# Altium PCB in3ator_LEDStrip2.PcbDoc
Units mm, origin at the board's own origin, x right, y up, seen from the top; angles counter-clockwise.
Board outline 215.27 x 145.28 mm, 2 copper layers (Top Layer, Bottom Layer); 100 components, 77 nets, 206 pads, 25 vias.
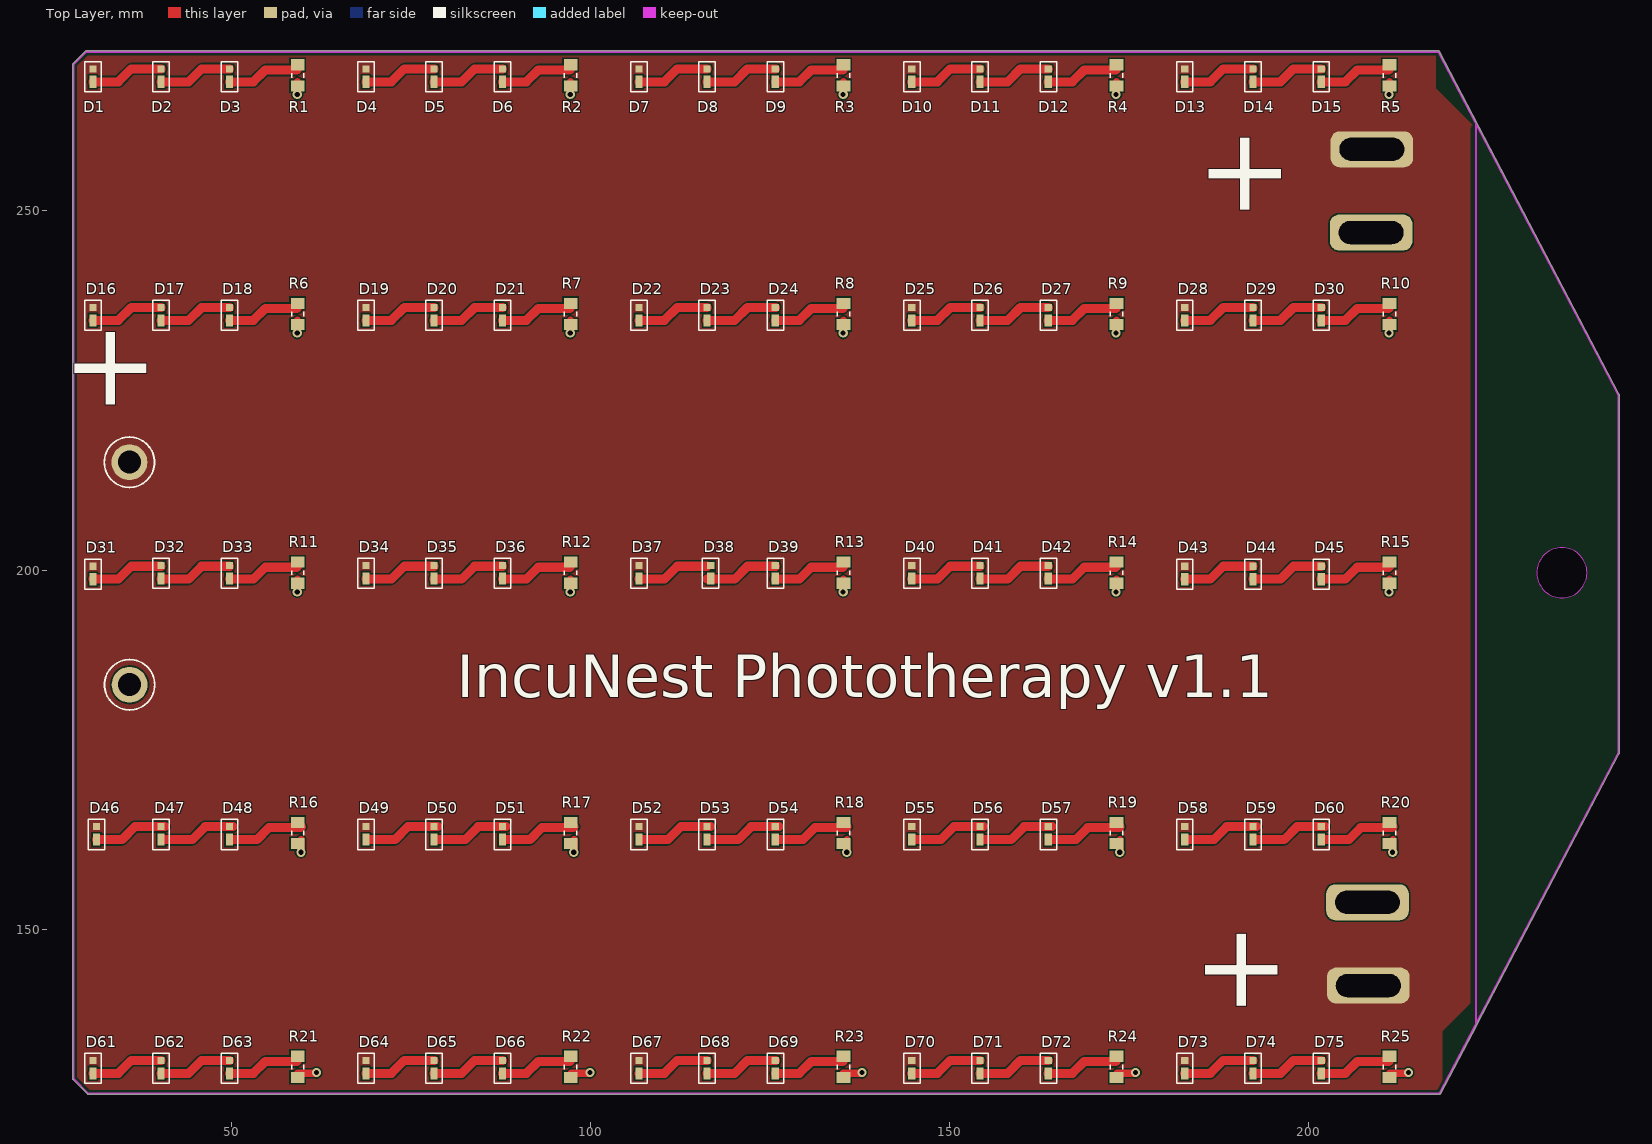
[diagram p0: Top Layer view]
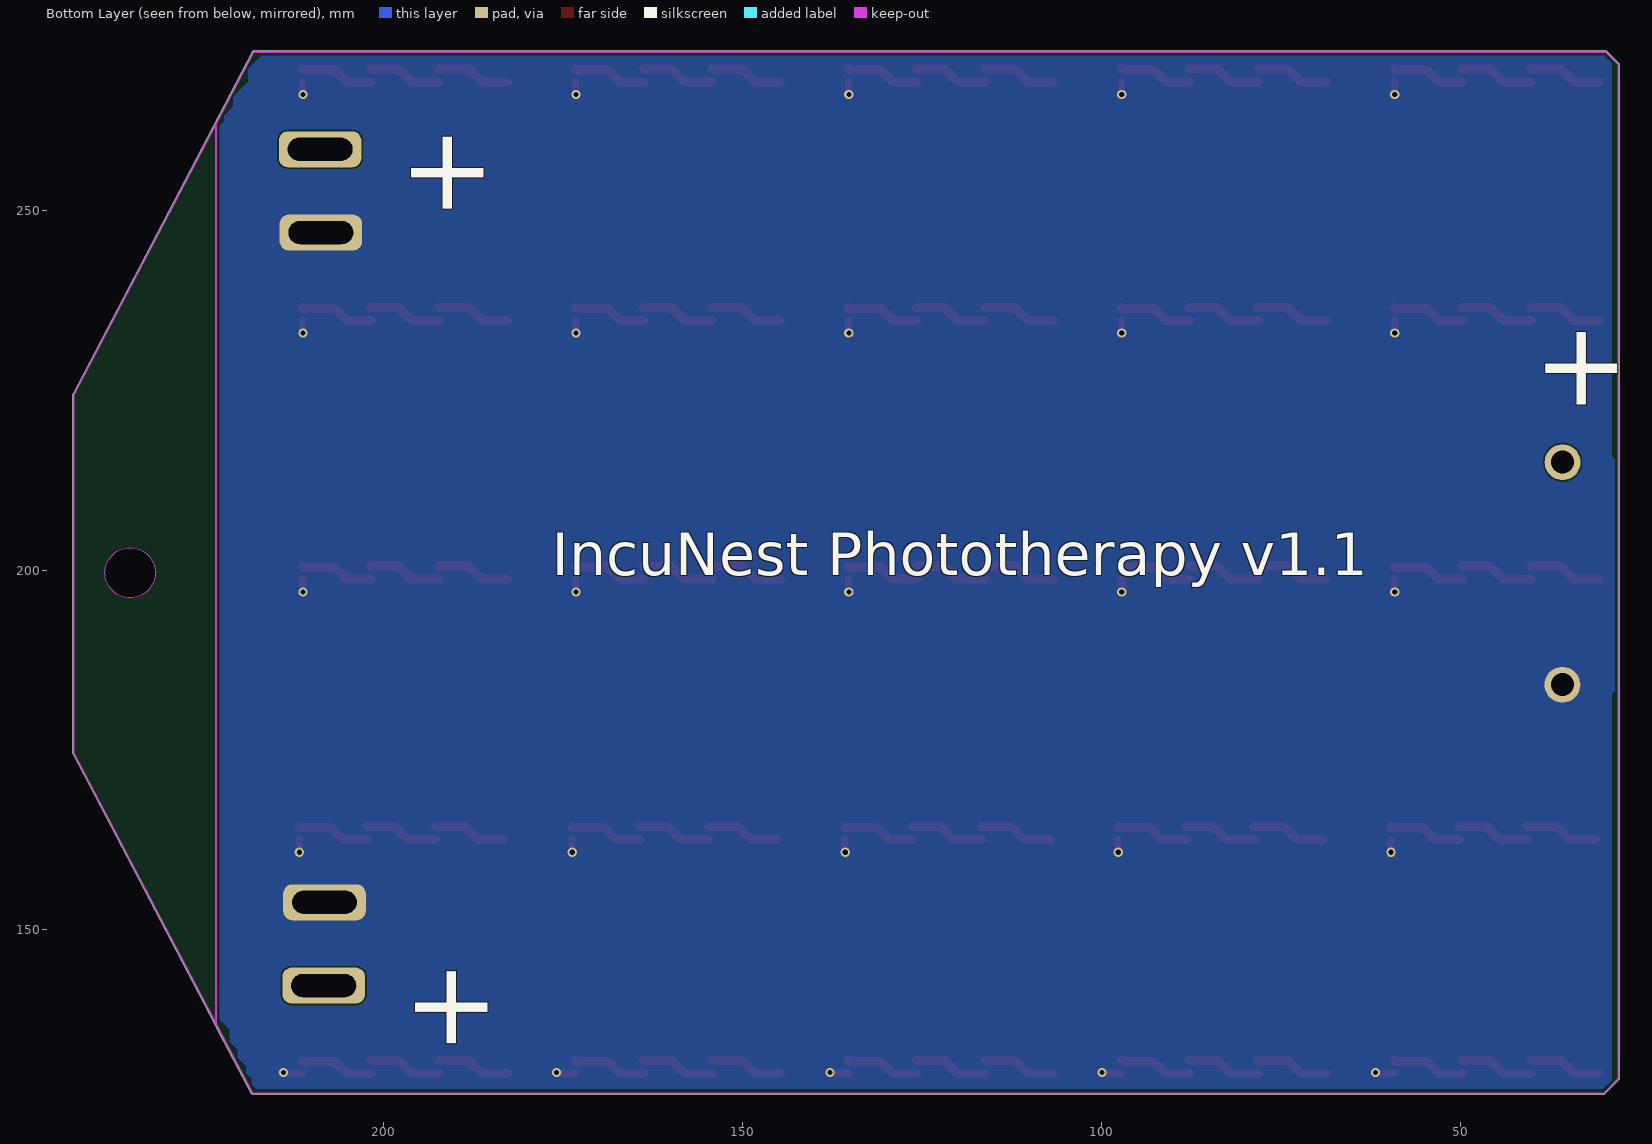
[diagram p1: Bottom Layer view, seen from below]

## Layer stack, top to bottom
Top Solder: solder mask 0.012, FC-001, Dk 4
Top Solder: solder mask 0.0102, Solder Resist, Dk 3.5
Top Layer: signal copper 0.0356
Dielectric 1: dielectric 0.32, FR-4, Dk 4.8
Bottom Layer: signal copper 0.0356
Flex Bottom Coverlay: solder mask 0.0102, Solder Resist, Dk 3.5
Flex Bottom Coverlay: solder mask 0.012, FC-001, Dk 4

## Board outline
27.977,129.068 cw(c28.067,129.159) 27.94,129.159 27.94,216.144 27.94,270.383 cw(c28.067,270.383) 27.94,270.39 cw(c28.067,270.397) 27.977,270.487 29.734,272.245 cw(c29.825,272.155) 29.894,272.261 218.067,272.261 cw(c218.067,272.134) 218.181,272.191 243.191,224.458 cw(c243.078,224.399) 243.205,224.399 243.205,174.517 cw(c243.078,174.517) 243.191,174.458 223.389,136.746 cw(c223.266,136.779) 223.363,136.696 218.311,127.075 cw(c218.198,127.134) 218.132,127.025 cw(c218.067,127.134) 218.067,127.007 30.092,127.007 cw(c30.092,127.134) 30.001,127.044 30.002,127.044
cut-out: 231.732,199.627 ccw(c235.232,199.627) 235.232,196.127 ccw(c235.232,199.627) 238.732,199.627 ccw(c235.232,199.627) 235.232,203.127 ccw(c235.232,199.627)

## Design rules (kind name [scope] priority, off if disabled: settings)
AssemblyTestPointUsage AssemblyTestPointUsage_1 [All] p2:
AssemblyTestpoint AssemblyTestpoint_1 [All] p2: testpointundercomponent=TRUE minsize=1.016 maxsize=2.54 preferedsize=1.524 minholesize=0 maxholesize=1.016 preferedholesize=0.813 testpointgrid=0.025 usegrid=TRUE gridtolerance=0 allowsidetop=TRUE allowsidebottom=TRUE
Clearance "Board outline clearance" [All vs OnLayer('Keep-Out Layer')] p1: gap=0.381 ignorepadtopadclearanceinfootprint=FALSE except(0: Arc-Hole Track-Hole SMDPad-Hole THPad-Hole Via-Hole Fill-Hole Poly-Hole Region-Hole Text-Hole)
Clearance Clearance_1 [All] p2: gap=0.2 ignorepadtopadclearanceinfootprint=FALSE except(0: Arc-Hole Track-Hole SMDPad-Hole THPad-Hole Via-Hole Fill-Hole Poly-Hole Region-Hole Text-Hole; 0.17: SMDPad-SMDPad; 0.254: Track-Via; 0.33: Track-THPad)
ComponentClearance [InComponent('L1')] p1: gap=0 collisioncheckmode=3 verticalgap=0.254 showdistances=FALSE
ComponentClearance UFL [InComponent('RF_CON1')] p2: gap=0 collisioncheckmode=3 verticalgap=0.254 showdistances=FALSE
ComponentClearance ComponentClearance_1 [All] p3: gap=0.254 collisioncheckmode=3 verticalgap=0.254 showdistances=FALSE
DiffPairsRouting [All] p1: maxlimit=0.254 minlimit=0.203 mostfreqgap=0.254 toplayer_minwidth=0.203 toplayer_maxwidth=0.381 toplayer_prefwidth=0.381 bottomlayer_minwidth=0.203 bottomlayer_maxwidth=0.381 bottomlayer_prefwidth=0.381 substack1={523C32A3-E987-4162-AA8D-483919F97A58} toplayer_{523c32a3-e987-4162-aa8d-483919f97a58}_minwidth=0.381 toplayer_{523c32a3-e987-4162-aa8d-483919f97a58}_maxwidth=0.381 toplayer_{523c32a3-e987-4162-aa8d-483919f97a58}_prefwidth=0.381 bottomlayer_{523c32a3-e987-4162-aa8d-483919f97a58}_minwidth=0.381 bottomlayer_{523c32a3-e987-4162-aa8d-483919f97a58}_maxwidth=0.381 bottomlayer_{523c32a3-e987-4162-aa8d-483919f97a58}_prefwidth=0.381 maxuncoupledlength=12.7
DiffPairsRouting DiffPairsRouting_1 [All] p2: maxlimit=0.254 minlimit=0.254 mostfreqgap=0.254 toplayer_minwidth=0.381 toplayer_maxwidth=0.381 toplayer_prefwidth=0.381 bottomlayer_minwidth=0.381 bottomlayer_maxwidth=0.381 bottomlayer_prefwidth=0.381 substack1={523C32A3-E987-4162-AA8D-483919F97A58} toplayer_{523c32a3-e987-4162-aa8d-483919f97a58}_minwidth=0.381 toplayer_{523c32a3-e987-4162-aa8d-483919f97a58}_maxwidth=0.381 toplayer_{523c32a3-e987-4162-aa8d-483919f97a58}_prefwidth=0.381 bottomlayer_{523c32a3-e987-4162-aa8d-483919f97a58}_minwidth=0.381 bottomlayer_{523c32a3-e987-4162-aa8d-483919f97a58}_maxwidth=0.381 bottomlayer_{523c32a3-e987-4162-aa8d-483919f97a58}_prefwidth=0.381 maxuncoupledlength=12.7
FabricationTestPointUsage FabricationTestPointUsage_1 [All] p2: valid=0 allowmultiple=FALSE
FabricationTestpoint FabricationTestpoint_1 [All] p2: side=3 testpointundercomponent=TRUE minsize=1.016 maxsize=2.54 preferedsize=1.524 minholesize=0 maxholesize=1.016 preferedholesize=0.813 testpointgrid=0.025 allowsidetop=TRUE allowsidebottom=TRUE usegrid=TRUE gridtolerance=0
FanoutControl Fanout_LCC [IsLCC] p1: bgadir=Out bgaviamode=Centered fanoutstyle=Auto fanoutdirection=Alternating viagrid=0.025 // Fanout_LCC (Default Rule)
FanoutControl Fanout_BGA [IsBGA] p2: bgadir=Out bgaviamode=Centered fanoutstyle=Auto fanoutdirection=Alternating viagrid=0.025 // Fanout_BGA (Default Rule)
FanoutControl Fanout_Small [(CompPinCount < 5)] p3: bgadir=Out bgaviamode=Centered fanoutstyle=Auto fanoutdirection=OutThenIn viagrid=0.025 // Fanout_Small (Default Rule)
FanoutControl Fanout_SOIC [IsSOIC] p4: bgadir=Out bgaviamode=Centered fanoutstyle=Auto fanoutdirection=Alternating viagrid=0.025 // Fanout_SOIC (Default Rule)
FanoutControl Fanout_BGA_1 [IsBGA] p6: bgadir=Out bgaviamode=Centered fanoutstyle=Auto fanoutdirection=Alternating viagrid=0.025 // Fanout_BGA (Default Rule)
FanoutControl Fanout_LCC_1 [IsLCC] p7: bgadir=Out bgaviamode=Centered fanoutstyle=Auto fanoutdirection=Alternating viagrid=0.025 // Fanout_LCC (Default Rule)
FanoutControl Fanout_SOIC_1 [IsSOIC] p8: bgadir=Out bgaviamode=Centered fanoutstyle=Auto fanoutdirection=Alternating viagrid=0.025 // Fanout_SOIC (Default Rule)
FanoutControl Fanout_Small_1 [(CompPinCount < 5)] p9: bgadir=Out bgaviamode=Centered fanoutstyle=Auto fanoutdirection=OutThenIn viagrid=0.025 // Fanout_Small (Default Rule)
FanoutControl Fanout_Default_1 [All] p10: bgadir=Out bgaviamode=Centered fanoutstyle=Auto fanoutdirection=Alternating viagrid=0.025 // Fanout_Default (Default Rule)
Height Height_1 [All] p1: minheight=0 maxheight=50 prefheight=12.7
HoleSize HoleSize_1 [All] p1: absolutevalues=TRUE maxlimit=15 minlimit=0.2 maxpercent=80.000 minpercent=20.000
HoleToHoleClearance u8 [All vs InComponent('u8_1')] p1: gap=0 allowstackedmicrovias=TRUE
HoleToHoleClearance [All] p2: gap=0.254 allowstackedmicrovias=TRUE
LayerPairs LayerPairs_1 [All] p1: enforce=TRUE
MinimumAnnularRing [All] p1: minimumring=0.1
MinimumSolderMaskSliver MinimumSolderMaskSliver_1 [All] p1 off: minsoldermaskwidth=0.2
NetAntennae NetAntennae_1 [All] p2: netantennaetolerance=0
PasteMaskExpansion PasteMaskExpansion_1 [All] p2: expansion=0
PlaneClearance PlaneClearance_1 [All] p1: clearance=0.508
PlaneConnect PlaneConnect_1 [All] p1: planeconnectstyle=Relief reliefexpansion=0.508 reliefentries=4 reliefconductorwidth=0.7 reliefairgap=0.254
PolygonConnect Power [All] p1: connectstyle=Direct reliefconductorwidth=2.54 reliefentries=4 polygonreliefangle="90 Angle" airgapwidth=0.254
RoutingCorners RoutingCorners_1 [All] p2: cornerstyle=45-Degree minsetback=2.54 maxsetback=2.54
RoutingLayers RoutingLayers_1 [All] p2: top layer_v5=TRUE bottom layer_v5=TRUE
RoutingPriority RoutingPriority_1 [All] p2: routingpriority=0
RoutingTopology RoutingTopology_1 [All] p2: topology=Shortest
RoutingVias RoutingVias_1 [All] p1: holewidth=0.3 width=0.5 viastyle="Through Hole" minholewidth=0.2 minwidth=0.4 maxholewidth=0.711 maxwidth=1.27
ShortCircuit ShortCircuit_Antenna [InNet('NetC10_2')] p1: allowed=TRUE
ShortCircuit ShortCircuit_1 [All] p2: allowed=FALSE
SilkToSilkClearance SilkToSilkClearance_1 [All] p1: silktosilkclearance=0
SilkToSolderMaskClearance SilkToSolderMaskClearance_1 [IsPad] p1: minsilkscreentomaskgap=0 clearancetoexposedcopper=TRUE
SolderMaskExpansion [All] p1: expansion=0.102 istentingtop=FALSE
SolderMaskExpansion SolderMaskExpansion_1 [All] p2: expansion=0.102 istentingtop=FALSE
UnRoutedNet UnRoutedNet_1 [All] p1:
UnpouredPolygon UnpouredPolygon_1 [All] p2:
Width Width_GSM_ANTENNA_1 [InNet('NetC10_2')] p1: maxlimit=0.35 minlimit=0.35 preferedwidth=0.35 substack1={523C32A3-E987-4162-AA8D-483919F97A58}
Width Width_GSM_ANTENNA_2 [InNet('NetC9_2')] p2: maxlimit=0.35 minlimit=0.35 preferedwidth=0.35 substack1={523C32A3-E987-4162-AA8D-483919F97A58}
Width Width_1 [All] p3: maxlimit=8 minlimit=0.1 preferedwidth=0.2 substack1={523C32A3-E987-4162-AA8D-483919F97A58}
13 further rules are at their usual default settings.

## Components (designator, comment, footprint, x,y, rotation, side; value= is the part's Value field where it differs from the comment)
D1 "XL-3014UBC-02" Diode_led 30.734,268.865 r270 top
D2 "XL-3014UBC-02" Diode_led 40.234,268.865 r270 top
D3 "XL-3014UBC-02" Diode_led 49.734,268.865 r270 top
D4 "XL-3014UBC-02" Diode_led 68.734,268.865 r270 top
D5 "XL-3014UBC-02" Diode_led 78.234,268.865 r270 top
D6 "XL-3014UBC-02" Diode_led 87.734,268.865 r270 top
D7 "XL-3014UBC-02" Diode_led 106.734,268.865 r270 top
D8 "XL-3014UBC-02" Diode_led 116.234,268.865 r270 top
D9 "XL-3014UBC-02" Diode_led 125.734,268.865 r270 top
D10 "XL-3014UBC-02" Diode_led 144.734,268.865 r270 top
D11 "XL-3014UBC-02" Diode_led 154.234,268.865 r270 top
D12 "XL-3014UBC-02" Diode_led 163.734,268.865 r270 top
D13 "XL-3014UBC-02" Diode_led 182.734,268.865 r270 top
D14 "XL-3014UBC-02" Diode_led 192.234,268.865 r270 top
D15 "XL-3014UBC-02" Diode_led 201.734,268.865 r270 top
D16 "XL-3014UBC-02" Diode_led 30.734,235.657 r270 top
D17 "XL-3014UBC-02" Diode_led 40.234,235.657 r270 top
D18 "XL-3014UBC-02" Diode_led 49.734,235.657 r270 top
D19 "XL-3014UBC-02" Diode_led 68.734,235.657 r270 top
D20 "XL-3014UBC-02" Diode_led 78.234,235.657 r270 top
D21 "XL-3014UBC-02" Diode_led 87.734,235.657 r270 top
D22 "XL-3014UBC-02" Diode_led 106.734,235.657 r270 top
D23 "XL-3014UBC-02" Diode_led 116.234,235.657 r270 top
D24 "XL-3014UBC-02" Diode_led 125.734,235.657 r270 top
D25 "XL-3014UBC-02" Diode_led 144.734,235.657 r270 top
D26 "XL-3014UBC-02" Diode_led 154.234,235.657 r270 top
D27 "XL-3014UBC-02" Diode_led 163.734,235.657 r270 top
D28 "XL-3014UBC-02" Diode_led 182.734,235.657 r270 top
D29 "XL-3014UBC-02" Diode_led 192.234,235.657 r270 top
D30 "XL-3014UBC-02" Diode_led 201.734,235.657 r270 top
D31 "XL-3014UBC-02" Diode_led 30.734,199.634 r270 top
D32 "XL-3014UBC-02" Diode_led 40.234,199.734 r270 top
D33 "XL-3014UBC-02" Diode_led 49.734,199.734 r270 top
D34 "XL-3014UBC-02" Diode_led 68.734,199.734 r270 top
D35 "XL-3014UBC-02" Diode_led 78.234,199.734 r270 top
D36 "XL-3014UBC-02" Diode_led 87.734,199.734 r270 top
D37 "XL-3014UBC-02" Diode_led 106.734,199.734 r270 top
D38 "XL-3014UBC-02" Diode_led 116.734,199.734 r270 top
D39 "XL-3014UBC-02" Diode_led 125.734,199.734 r270 top
D40 "XL-3014UBC-02" Diode_led 144.734,199.734 r270 top
D41 "XL-3014UBC-02" Diode_led 154.234,199.734 r270 top
D42 "XL-3014UBC-02" Diode_led 163.734,199.734 r270 top
D43 "XL-3014UBC-02" Diode_led 182.734,199.634 r270 top
D44 "XL-3014UBC-02" Diode_led 192.234,199.634 r270 top
D45 "XL-3014UBC-02" Diode_led 201.734,199.634 r270 top
D46 "XL-3014UBC-02" Diode_led 31.231,163.384 r270 top
D47 "XL-3014UBC-02" Diode_led 40.234,163.384 r270 top
D48 "XL-3014UBC-02" Diode_led 49.734,163.384 r270 top
D49 "XL-3014UBC-02" Diode_led 68.734,163.384 r270 top
D50 "XL-3014UBC-02" Diode_led 78.234,163.384 r270 top
D51 "XL-3014UBC-02" Diode_led 87.734,163.384 r270 top
D52 "XL-3014UBC-02" Diode_led 106.734,163.384 r270 top
D53 "XL-3014UBC-02" Diode_led 116.234,163.384 r270 top
D54 "XL-3014UBC-02" Diode_led 125.734,163.384 r270 top
D55 "XL-3014UBC-02" Diode_led 144.734,163.384 r270 top
D56 "XL-3014UBC-02" Diode_led 154.234,163.384 r270 top
D57 "XL-3014UBC-02" Diode_led 163.734,163.384 r270 top
D58 "XL-3014UBC-02" Diode_led 182.734,163.384 r270 top
D59 "XL-3014UBC-02" Diode_led 192.234,163.384 r270 top
D60 "XL-3014UBC-02" Diode_led 201.734,163.384 r270 top
D61 "XL-3014UBC-02" Diode_led 30.734,130.835 r270 top
D62 "XL-3014UBC-02" Diode_led 40.234,130.835 r270 top
D63 "XL-3014UBC-02" Diode_led 49.734,130.835 r270 top
D64 "XL-3014UBC-02" Diode_led 68.734,130.835 r270 top
D65 "XL-3014UBC-02" Diode_led 78.234,130.835 r270 top
D66 "XL-3014UBC-02" Diode_led 87.734,130.835 r270 top
D67 "XL-3014UBC-02" Diode_led 106.734,130.835 r270 top
D68 "XL-3014UBC-02" Diode_led 116.234,130.835 r270 top
D69 "XL-3014UBC-02" Diode_led 125.734,130.835 r270 top
D70 "XL-3014UBC-02" Diode_led 144.734,130.835 r270 top
D71 "XL-3014UBC-02" Diode_led 154.234,130.835 r270 top
D72 "XL-3014UBC-02" Diode_led 163.734,130.835 r270 top
D73 "XL-3014UBC-02" Diode_led 182.734,130.835 r270 top
D74 "XL-3014UBC-02" Diode_led 192.234,130.835 r270 top
D75 "XL-3014UBC-02" Diode_led 201.734,130.835 r270 top
R1 "39R 1206 0.5W 1%" CAPC3216X180X55ML20T25 59.234,268.865 r270 top
R2 "39R 1206 0.5W 1%" CAPC3216X180X55ML20T25 97.234,268.865 r270 top
R3 "39R 1206 0.5W 1%" CAPC3216X180X55ML20T25 135.234,268.865 r270 top
R4 "39R 1206 0.5W 1%" CAPC3216X180X55ML20T25 173.234,268.865 r270 top
R5 "39R 1206 0.5W 1%" CAPC3216X180X55ML20T25 211.234,268.865 r270 top
R6 "39R 1206 0.5W 1%" CAPC3216X180X55ML20T25 59.234,235.657 r270 top
R7 "39R 1206 0.5W 1%" CAPC3216X180X55ML20T25 97.234,235.657 r270 top
R8 "39R 1206 0.5W 1%" CAPC3216X180X55ML20T25 135.234,235.657 r270 top
R9 "39R 1206 0.5W 1%" CAPC3216X180X55ML20T25 173.234,235.657 r270 top
R10 "39R 1206 0.5W 1%" CAPC3216X180X55ML20T25 211.234,235.657 r270 top
R11 "39R 1206 0.5W 1%" CAPC3216X180X55ML20T25 59.234,199.634 r270 top
R12 "39R 1206 0.5W 1%" CAPC3216X180X55ML20T25 97.234,199.634 r270 top
R13 "39R 1206 0.5W 1%" CAPC3216X180X55ML20T25 135.234,199.634 r270 top
R14 "39R 1206 0.5W 1%" CAPC3216X180X55ML20T25 173.234,199.634 r270 top
R15 "39R 1206 0.5W 1%" CAPC3216X180X55ML20T25 211.234,199.634 r270 top
R16 "39R 1206 0.5W 1%" CAPC3216X180X55ML20T25 59.234,163.384 r270 top
R17 "39R 1206 0.5W 1%" CAPC3216X180X55ML20T25 97.234,163.384 r270 top
R18 "39R 1206 0.5W 1%" CAPC3216X180X55ML20T25 135.234,163.384 r270 top
R19 "39R 1206 0.5W 1%" CAPC3216X180X55ML20T25 173.234,163.384 r270 top
R20 "39R 1206 0.5W 1%" CAPC3216X180X55ML20T25 211.234,163.384 r270 top
R21 "39R 1206 0.5W 1%" CAPC3216X180X55ML20T25 59.234,130.835 r270 top
R22 "39R 1206 0.5W 1%" CAPC3216X180X55ML20T25 97.234,130.835 r270 top
R23 "39R 1206 0.5W 1%" CAPC3216X180X55ML20T25 135.234,130.835 r270 top
R24 "39R 1206 0.5W 1%" CAPC3216X180X55ML20T25 173.234,130.835 r270 top
R25 "39R 1206 0.5W 1%" CAPC3216X180X55ML20T25 211.234,130.835 r270 top

## Footprints (in the part's own frame and the unit in brackets; to place one, negate y for a bottom-side part, rotate by r counter-clockwise, add the part's x,y. Pads: shape width x height; smd on the part's side, far side on the other; paste and mask are expansions set on the pad)
CAPC3216X180X55ML20T25 [mm]
  rect 1.55x1.9 smd: 1(-1.475,0) 2(1.475,0)
  silkscreen extent -0.3,-0.85 0.3,0.85, body extent -1.7,-0.9 1.7,0.9, height 1.8
Diode_led [mm]
  rect 1x1 smd: 1(-0.9,0)
  rect 1.7x1 smd: 2(0.9,0)
  silkscreen extent -1.91,-1.14 2.29,1.14

## Part data
D1 D2 D3 D4 D5 D6 D7 D8 D9 D10 D11 D12 D13 D14 D15 D16 D17 D18 D19 D20 D21 D22 D23 D24 D25 D26 D27 D28 D29 D30 D31 D32 D33 D34 D35 D36 D37 D38 D39 D40 D41 D42 D43 D44 D45 D46 D47 D48 D49 D50 D51 D52 D53 D54 D55 D56 D57 D58 D59 D60 D61 D62 D63 D64 D65 D66 D67 D68 D69 D70 D71 D72 D73 D74 D75: library part CMP-05535-000002-1, "LED GREEN ESS II SMD", Ambient Temperature Range High=+85°C, Ambient Temperature Range Low=-30°C, Colour=Green, Forward Current=5mA, Forward Voltage=1.95V, LCSC_PN=C2843789, Manufacturer=Panasonic, Manufacturer Part Number=LNJ337W83RA, Power Dissipation=55mW, Reverse Voltage=4V, Temperature="-30°C to +85°C", Automotive=No, Category=Diode, ComponentLink2Description=Datasheet, ComponentLink2URL=https://industrial.panasonic.com/content/data/SC/ds/ds4/LNJ337W83RA_E.pdf, Device Class L1=Optoelectronics, Device Class L2=LEDs, Device Class L3=unset, Digikey Description="LED GREEN ESS II SMD", Height=0.25mm, Lead Free=Yes, Led Orientation="Top View", Luminous Intensity=7.5mcd, Mouser Description="LNJ337W83RA; ESS II Series Yellow-Green LED; 572 nm 1608(0603); Rectangle Lens", Obsolete Part=true, Octopart=https://octopart.com/lnj337w83ra-panasonic-44404387, Package=LNJ337W83RA, Peak Emmision Wavelength=575nm, RoHS=TRUE, Temperature Range High=+85°C, Temperature Range Low=-30°C, Wavelength=572nm
R1 R2 R3 R4 R5 R6 R7 R8 R9 R10 R11 R12 R13 R14 R15 R16 R17 R18 R19 R20 R21 R22 R23 R24 R25: library part CMP-0abdc173b10ad57a-1, Case/Package=1206, LCSC_PN=C137295, Manufacturer Part Number=WSLP12065L000FEA, Manufacturer Part Number 2=FMF06FTHR005-LHL, Power=1W, Resistance=0,002, Lifecycle Status="Not Listed by Manufacturer", Octopart URL=https://octopart.com/1-2176055-0-te+connectivity-46440145, OctopartID=0abdc173b10ad57a, OrderingCode=WSLP12065L000FEA, Packaging="Tape & Reel (TR)"

## Free pads (board coordinates)
  round 5 hole 3.2: 0(35.814,215.011) 0(35.844,184.037)
  rrect50% 11.5x5 hole 3.2 slot 9 at 0 deg: 0(208.173,153.741) 0(208.286,142.154) 0(208.675,246.985) 0(208.788,258.572)

## Via types
v1: diameter 1.27, hole 0.711, Top Layer to Bottom Layer, tented both sides, 25 vias

## Nets (pads, with @x,y where several pads share a name; then routed paths per layer and width w, separated by ;. In a path a pad name is that pad's centre, name@x,y a point inside that pad or via, vN(x,y) a via of type N, cw(c..) or ccw(c..) an arc to the next point about the centre after c; other vN are vias at no path point)
12V@2A: D1.1 D4.1 D7.1 D10.1 D13.1 D16.1 D19.1 D22.1 D25.1 D28.1 D31.1 D34.1 D37.1 D40.1 D43.1 D46.1 D49.1 D52.1 D55.1 D58.1 D61.1 D64.1 D67.1 D70.1 D73.1 pad.0@35.814,215.011 pad.0@208.286,142.154 pad.0@208.788,258.572
GND: pad.0@35.844,184.037 pad.0@208.173,153.741 pad.0@208.675,246.985 R1.2 R2.2 R3.2 R4.2 R5.2 R6.2 R7.2 R8.2 R9.2 R10.2 R11.2 R12.2 R13.2 R14.2 R15.2 R16.2 R17.2 R18.2 R19.2 R20.2 R21.2 R22.2 R23.2 R24.2 R25.2 | length 50.2
  Top Layer w1: v1(59.182,196.961) 59.182,197.088 59.234,197.14 R11.2@59.234,198.757 ; v1(59.182,232.984) 59.182,233.111 59.234,233.163 R6.2@59.234,234.78 ; v1(59.182,266.192) 59.182,266.319 59.234,266.371 R1.2@59.234,267.988 ; R21.2@59.234,129.958 61.759,129.958 v1(61.849,130.048) ; v1(59.679,160.711) 59.679,160.838 59.731,160.89 R16.2@59.731,162.507 ; v1(97.182,196.961) 97.182,197.088 97.234,197.14 R12.2@97.234,198.757 ; v1(97.182,232.984) 97.182,233.111 97.234,233.163 R7.2@97.234,234.78 ; v1(97.182,266.192) 97.182,266.319 97.234,266.371 R2.2@97.234,267.988 ; R22.2@97.334,129.958 99.859,129.958 v1(99.949,130.048) ; v1(97.679,160.711) 97.679,160.838 97.731,160.89 R17.2@97.731,162.507 ; R23.2@135.18,129.958 137.705,129.958 v1(137.795,130.048) ; v1(135.182,196.961) 135.182,197.088 135.234,197.14 R13.2@135.234,198.757 ; v1(135.182,232.984) 135.182,233.111 135.234,233.163 R8.2@135.234,234.78 ; v1(135.182,266.192) 135.182,266.319 135.234,266.371 R3.2@135.234,267.988 ; v1(135.679,160.711) 135.679,160.838 135.731,160.89 R18.2@135.731,162.507 ; v1(173.182,196.961) 173.182,197.088 173.234,197.14 R14.2@173.234,198.757 ; v1(173.182,232.984) 173.182,233.111 173.234,233.163 R9.2@173.234,234.78 ; v1(173.182,266.192) 173.182,266.319 173.234,266.371 R4.2@173.234,267.988 ; R24.2@173.28,129.958 175.805,129.958 v1(175.895,130.048) ; v1(173.679,160.711) 173.679,160.838 173.731,160.89 R19.2@173.731,162.507 ; v1(211.182,196.961) 211.182,197.088 211.234,197.14 R15.2@211.234,198.757 ; v1(211.182,232.984) 211.182,233.111 211.234,233.163 R10.2@211.234,234.78 ; v1(211.182,266.192) 211.182,266.319 211.234,266.371 211.234,267.988 R5.2 ; R25.2@211.253,129.958 213.778,129.958 v1(213.868,130.048) ; v1(211.679,160.711) 211.679,160.838 211.731,160.89 R20.2@211.731,162.507
NetD1_2: D1.2 D2.1 | length 10.2
  Top Layer w1.27: D1.2 34.285,267.965 36.085,269.765 D2.1
NetD2_2: D2.2 D3.1 | length 10.2
  Top Layer w1.27: D2.2 44.064,267.965 45.864,269.765 D3.1
NetD3_2: D3.2 R1.1 | length 10.2
  Top Layer w1.27: D3.2 53.081,267.965 54.737,269.621 59.113,269.621 R1.1@59.234,269.742
NetD4_2: D4.2 D5.1 | length 10.2
  Top Layer w1.27: D4.2 72.285,267.965 74.085,269.765 D5.1
NetD5_2: D5.2 D6.1 | length 10.2
  Top Layer w1.27: D5.2 82.064,267.965 83.864,269.765 D6.1
NetD6_2: D6.2 R2.1 | length 10.2
  Top Layer w1.27: D6.2 91.081,267.965 92.737,269.621 97.113,269.621 R2.1@97.234,269.742
NetD7_2: D7.2 D8.1 | length 10.2
  Top Layer w1.27: D7.2 110.285,267.965 112.085,269.765 D8.1
NetD8_2: D8.2 D9.1 | length 10.2
  Top Layer w1.27: D8.2 120.064,267.965 121.864,269.765 D9.1
NetD9_2: D9.2 R3.1 | length 10.2
  Top Layer w1.27: D9.2 129.081,267.965 130.737,269.621 135.113,269.621 R3.1@135.234,269.742
NetD10_2: D10.2 D11.1 | length 10.2
  Top Layer w1.27: D10.2 148.285,267.965 150.085,269.765 D11.1
NetD11_2: D11.2 D12.1 | length 10.2
  Top Layer w1.27: D11.2 158.064,267.965 159.864,269.765 D12.1
NetD12_2: D12.2 R4.1 | length 10.2
  Top Layer w1.27: D12.2 167.081,267.965 168.737,269.621 173.113,269.621 R4.1@173.234,269.742
NetD13_2: D13.2 D14.1 | length 10.2
  Top Layer w1.27: D13.2 186.285,267.965 188.085,269.765 D14.1
NetD14_2: D14.2 D15.1 | length 10.2
  Top Layer w1.27: D14.2 196.064,267.965 197.864,269.765 D15.1
NetD15_2: D15.2 R5.1 | length 10.2
  Top Layer w1.27: D15.2 205.081,267.965 206.737,269.621 211.113,269.621 R5.1@211.234,269.742
NetD16_2: D16.2 D17.1 | length 10.2
  Top Layer w1.27: D16.2 34.285,234.757 36.085,236.557 D17.1
NetD17_2: D17.2 D18.1 | length 10.2
  Top Layer w1.27: D17.2 44.064,234.757 45.864,236.557 D18.1
NetD18_2: D18.2 R6.1 | length 10.2
  Top Layer w1.27: D18.2 53.081,234.757 54.737,236.413 59.113,236.413 R6.1@59.234,236.534
NetD19_2: D19.2 D20.1 | length 10.2
  Top Layer w1.27: D19.2 72.285,234.757 74.085,236.557 D20.1
NetD20_2: D20.2 D21.1 | length 10.2
  Top Layer w1.27: D20.2 82.064,234.757 83.864,236.557 D21.1
NetD21_2: D21.2 R7.1 | length 10.2
  Top Layer w1.27: D21.2 91.081,234.757 92.737,236.413 97.113,236.413 R7.1@97.234,236.534
NetD22_2: D22.2 D23.1 | length 10.2
  Top Layer w1.27: D22.2 110.285,234.757 112.085,236.557 D23.1
NetD23_2: D23.2 D24.1 | length 10.2
  Top Layer w1.27: D23.2 120.064,234.757 121.864,236.557 D24.1
NetD24_2: D24.2 R8.1 | length 10.2
  Top Layer w1.27: D24.2 129.081,234.757 130.737,236.413 135.113,236.413 R8.1@135.234,236.534
NetD25_2: D25.2 D26.1 | length 10.2
  Top Layer w1.27: D25.2 148.285,234.757 150.085,236.557 D26.1
NetD26_2: D26.2 D27.1 | length 10.2
  Top Layer w1.27: D26.2 158.064,234.757 159.864,236.557 D27.1
NetD27_2: D27.2 R9.1 | length 10.2
  Top Layer w1.27: D27.2 167.081,234.757 168.737,236.413 173.113,236.413 R9.1@173.234,236.534
NetD28_2: D28.2 D29.1 | length 10.2
  Top Layer w1.27: D28.2 186.285,234.757 188.085,236.557 D29.1
NetD29_2: D29.2 D30.1 | length 10.2
  Top Layer w1.27: D29.2 196.064,234.757 197.864,236.557 D30.1
NetD30_2: D30.2 R10.1 | length 10.2
  Top Layer w1.27: D30.2 205.081,234.757 206.737,236.413 211.113,236.413 R10.1@211.234,236.534
NetD31_2: D31.2 D32.1 | length 10.2
  Top Layer w1.27: D31.2 34.285,198.734 36.085,200.534 D32.1@40.234,200.534
NetD32_2: D32.2 D33.1 | length 10.2
  Top Layer w1.27: D32.2@40.234,198.734 44.064,198.734 45.864,200.534 D33.1@49.734,200.534
NetD33_2: D33.2 R11.1 | length 10.2
  Top Layer w1.27: D33.2@49.734,198.734 53.081,198.734 54.737,200.39 59.113,200.39 R11.1@59.234,200.511
NetD34_2: D34.2 D35.1 | length 10.2
  Top Layer w1.27: D34.2@68.734,198.734 72.285,198.734 74.085,200.534 D35.1@78.234,200.534
NetD35_2: D35.2 D36.1 | length 10.2
  Top Layer w1.27: D35.2@78.234,198.734 82.064,198.734 83.864,200.534 D36.1@87.734,200.534
NetD36_2: D36.2 R12.1 | length 10.2
  Top Layer w1.27: D36.2@87.734,198.734 91.081,198.734 92.737,200.39 97.113,200.39 R12.1@97.234,200.511
NetD37_2: D37.2 D38.1 | length 10.2
  Top Layer w1.27: D37.2@106.734,198.734 110.285,198.734 112.085,200.534 116.234,200.534
NetD38_2: D38.2 D39.1 | length 10.2
  Top Layer w1.27: 116.234,198.734 120.064,198.734 121.864,200.534 D39.1@125.734,200.534
NetD39_2: D39.2 R13.1 | length 10.2
  Top Layer w1.27: D39.2@125.734,198.734 129.081,198.734 130.737,200.39 135.113,200.39 R13.1@135.234,200.511
NetD40_2: D40.2 D41.1 | length 10.2
  Top Layer w1.27: D40.2@144.734,198.734 148.285,198.734 150.085,200.534 D41.1@154.234,200.534
NetD41_2: D41.2 D42.1 | length 10.2
  Top Layer w1.27: D41.2@154.234,198.734 158.064,198.734 159.864,200.534 D42.1@163.734,200.534
NetD42_2: D42.2 R14.1 | length 10.2
  Top Layer w1.27: D42.2@163.734,198.734 167.081,198.734 168.737,200.39 173.113,200.39 R14.1@173.234,200.511
NetD43_2: D43.2 D44.1 | length 10.2
  Top Layer w1.27: D43.2 186.285,198.734 188.085,200.534 D44.1
NetD44_2: D44.2 D45.1 | length 10.2
  Top Layer w1.27: D44.2 196.064,198.734 197.864,200.534 D45.1
NetD45_2: D45.2 R15.1 | length 10.2
  Top Layer w1.27: D45.2 205.081,198.734 206.737,200.39 211.113,200.39 R15.1@211.234,200.511
NetD46_2: D46.2 D47.1 | length 10.2
  Top Layer w1.27: D46.2 34.782,162.484 36.582,164.284 D47.1@40.731,164.284
NetD47_2: D47.2 D48.1 | length 10.2
  Top Layer w1.27: D47.2@40.731,162.484 44.561,162.484 46.361,164.284 D48.1@50.231,164.284
NetD48_2: D48.2 R16.1 | length 10.2
  Top Layer w1.27: D48.2@50.231,162.484 53.578,162.484 55.234,164.14 59.61,164.14 R16.1@59.731,164.261
NetD49_2: D49.2 D50.1 | length 10.2
  Top Layer w1.27: D49.2@69.231,162.484 72.782,162.484 74.582,164.284 D50.1@78.731,164.284
NetD50_2: D50.2 D51.1 | length 10.2
  Top Layer w1.27: D50.2@78.731,162.484 82.561,162.484 84.361,164.284 D51.1@88.231,164.284
NetD51_2: D51.2 R17.1 | length 10.2
  Top Layer w1.27: D51.2@88.231,162.484 91.578,162.484 93.234,164.14 97.61,164.14 R17.1@97.731,164.261
NetD52_2: D52.2 D53.1 | length 10.2
  Top Layer w1.27: D52.2@107.231,162.484 110.782,162.484 112.582,164.284 D53.1@116.731,164.284
NetD53_2: D53.2 D54.1 | length 10.2
  Top Layer w1.27: D53.2@116.731,162.484 120.561,162.484 122.361,164.284 D54.1@126.231,164.284
NetD54_2: D54.2 R18.1 | length 10.2
  Top Layer w1.27: D54.2@126.231,162.484 129.578,162.484 131.234,164.14 135.61,164.14 R18.1@135.731,164.261
NetD55_2: D55.2 D56.1 | length 10.2
  Top Layer w1.27: D55.2@145.231,162.484 148.782,162.484 150.582,164.284 D56.1@154.731,164.284
NetD56_2: D56.2 D57.1 | length 10.2
  Top Layer w1.27: D56.2@154.731,162.484 158.561,162.484 160.361,164.284 D57.1@164.231,164.284
NetD57_2: D57.2 R19.1 | length 10.2
  Top Layer w1.27: D57.2@164.231,162.484 167.578,162.484 169.234,164.14 173.61,164.14 R19.1@173.731,164.261
NetD58_2: D58.2 D59.1 | length 10.2
  Top Layer w1.27: D58.2@183.231,162.484 186.782,162.484 188.582,164.284 D59.1@192.731,164.284
NetD59_2: D59.2 D60.1 | length 10.2
  Top Layer w1.27: D59.2@192.731,162.484 196.561,162.484 198.361,164.284 D60.1@202.231,164.284
NetD60_2: D60.2 R20.1 | length 10.2
  Top Layer w1.27: D60.2@202.231,162.484 205.578,162.484 207.234,164.14 211.61,164.14 R20.1@211.731,164.261
NetD61_2: D61.2 D62.1 | length 10.2
  Top Layer w1.27: D61.2 34.285,129.935 36.085,131.735 D62.1
NetD62_2: D62.2 D63.1 | length 10.2
  Top Layer w1.27: D62.2 44.064,129.935 45.864,131.735 D63.1
NetD63_2: D63.2 R21.1 | length 10.2
  Top Layer w1.27: D63.2 53.081,129.935 54.737,131.591 59.113,131.591 R21.1@59.234,131.712
NetD64_2: D64.2 D65.1 | length 10.2
  Top Layer w1.27: D64.2 72.285,129.935 74.085,131.735 D65.1
NetD65_2: D65.2 D66.1 | length 10.2
  Top Layer w1.27: D65.2 82.064,129.935 83.864,131.735 D66.1
NetD66_2: D66.2 R22.1 | length 10.2
  Top Layer w1.27: D66.2 91.081,129.935 92.737,131.591 97.113,131.591 R22.1@97.234,131.712
NetD67_2: D67.2 D68.1 | length 10.2
  Top Layer w1.27: D67.2 110.285,129.935 112.085,131.735 D68.1
NetD68_2: D68.2 D69.1 | length 10.2
  Top Layer w1.27: D68.2 120.064,129.935 121.864,131.735 D69.1
NetD69_2: D69.2 R23.1 | length 10.2
  Top Layer w1.27: D69.2 129.081,129.935 130.737,131.591 135.113,131.591 R23.1@135.234,131.712
NetD70_2: D70.2 D71.1 | length 10.2
  Top Layer w1.27: D70.2 148.285,129.935 150.085,131.735 D71.1
NetD71_2: D71.2 D72.1 | length 10.2
  Top Layer w1.27: D71.2 158.064,129.935 159.864,131.735 D72.1
NetD72_2: D72.2 R24.1 | length 10.2
  Top Layer w1.27: D72.2 167.081,129.935 168.737,131.591 173.113,131.591 R24.1@173.234,131.712
NetD73_2: D73.2 D74.1 | length 10.2
  Top Layer w1.27: D73.2 186.285,129.935 188.085,131.735 D74.1
NetD74_2: D74.2 D75.1 | length 10.2
  Top Layer w1.27: D74.2 196.064,129.935 197.864,131.735 D75.1
NetD75_2: D75.2 R25.1 | length 10.2
  Top Layer w1.27: D75.2 205.081,129.935 206.737,131.591 211.113,131.591 R25.1@211.234,131.712

## Polygon pours and split planes (outlines as drawn)
GND on Bottom Layer "12V@2A" (solid, remove dead copper, pour order 7): 28.829,271.653 28.956,271.526 28.956,215.773 16.129,202.946 16.002,202.946 16.002,195.707 28.956,182.753 28.956,127.889 29.083,127.762 217.678,127.762 218.313,128.397 218.313,129.159 219.202,130.048 219.075,130.175 219.075,130.937 220.218,132.08 220.218,133.223 221.361,134.366 221.361,136.017 223.012,137.668 223.012,261.62 222.123,262.509 222.123,263.271 220.853,264.541 220.853,265.938 218.821,267.97 218.821,269.748 216.916,271.653
12V@2A on Top Layer "12V@2A_L01_P006" (solid, remove dead copper, pour order 6): 222.885,261.874 217.678,267.081 217.678,271.907 28.575,271.907 28.448,271.78 28.448,216.027 15.621,203.2 15.621,195.707 28.448,182.88 28.448,127.635 28.575,127.508 28.702,127.635 217.805,127.635 218.567,128.397 218.567,135.763 222.504,139.7 222.504,261.493 222.758,261.747 222.25,261.747

## Keep-outs
Keep-Out Layer:
  lines w0.254: 28.067,270.383 28.067,216.144 ; 28.067,270.397 29.825,272.155 ; 29.845,272.134 218.067,272.134 243.078,224.399 243.078,174.517 218.198,127.134 ; 218.067,127.134 30.092,127.134 28.067,129.159 28.067,182.743 ; 223.266,136.779 223.266,262.128 ; 28.067,182.743 28.067,216.144 ; 28.067,182.743 28.067,216.144

## Silkscreen, mask and mechanical layers (free items; w line width, h text height)
Flex Top Overlay:
  circle w0.254: c35.844,184.037 r3.5
  circle w0.254: c35.814,215.011 r3.5
  text "+" at 200.025,261.874 h20 r90
  text "-" at 204.597,249.936 h40 r90
  text "+" at 39.878,219.202 h20
  text "IncuNest Phototherapy v1.1" at 81.407,180.34 h10.16
  text "-" at 39.878,167.132 h40
  text "-" at 204.095,149.52 h40 r90
  text "+" at 199.523,137.582 h20 r90
Bottom Overlay:
  text "+" at 199.898,262.001 h20 r90
  text "-" at 184.277,242.062 h40 r270
  text "+" at 39.878,219.202 h20
  text "IncuNest Phototherapy v1.1" at 176.53,197.358 h10.16
  text "-" at 39.878,167.132 h40
  text "-" at 183.769,149.479 h40 r270
  text "+" at 199.39,145.796 h20 r90
Mechanical 1:
  circle w0.013: c235.276,199.634 r3.5